# Altium PCB PX4FMUv2.4.6.PcbDoc (part 2 of 3)
Units mil, origin at the board's own origin, x right, y up, seen from the top; angles counter-clockwise.
Board outline 2756 x 1595 mil, 6 copper layers (Top, Ground, Horizontal, Vertical, Power, Bottom), stack 65.355 mil thick; 290 components, 261 nets, 1159 pads, 472 vias.
Unrouted connection lines stored in the file: 14.
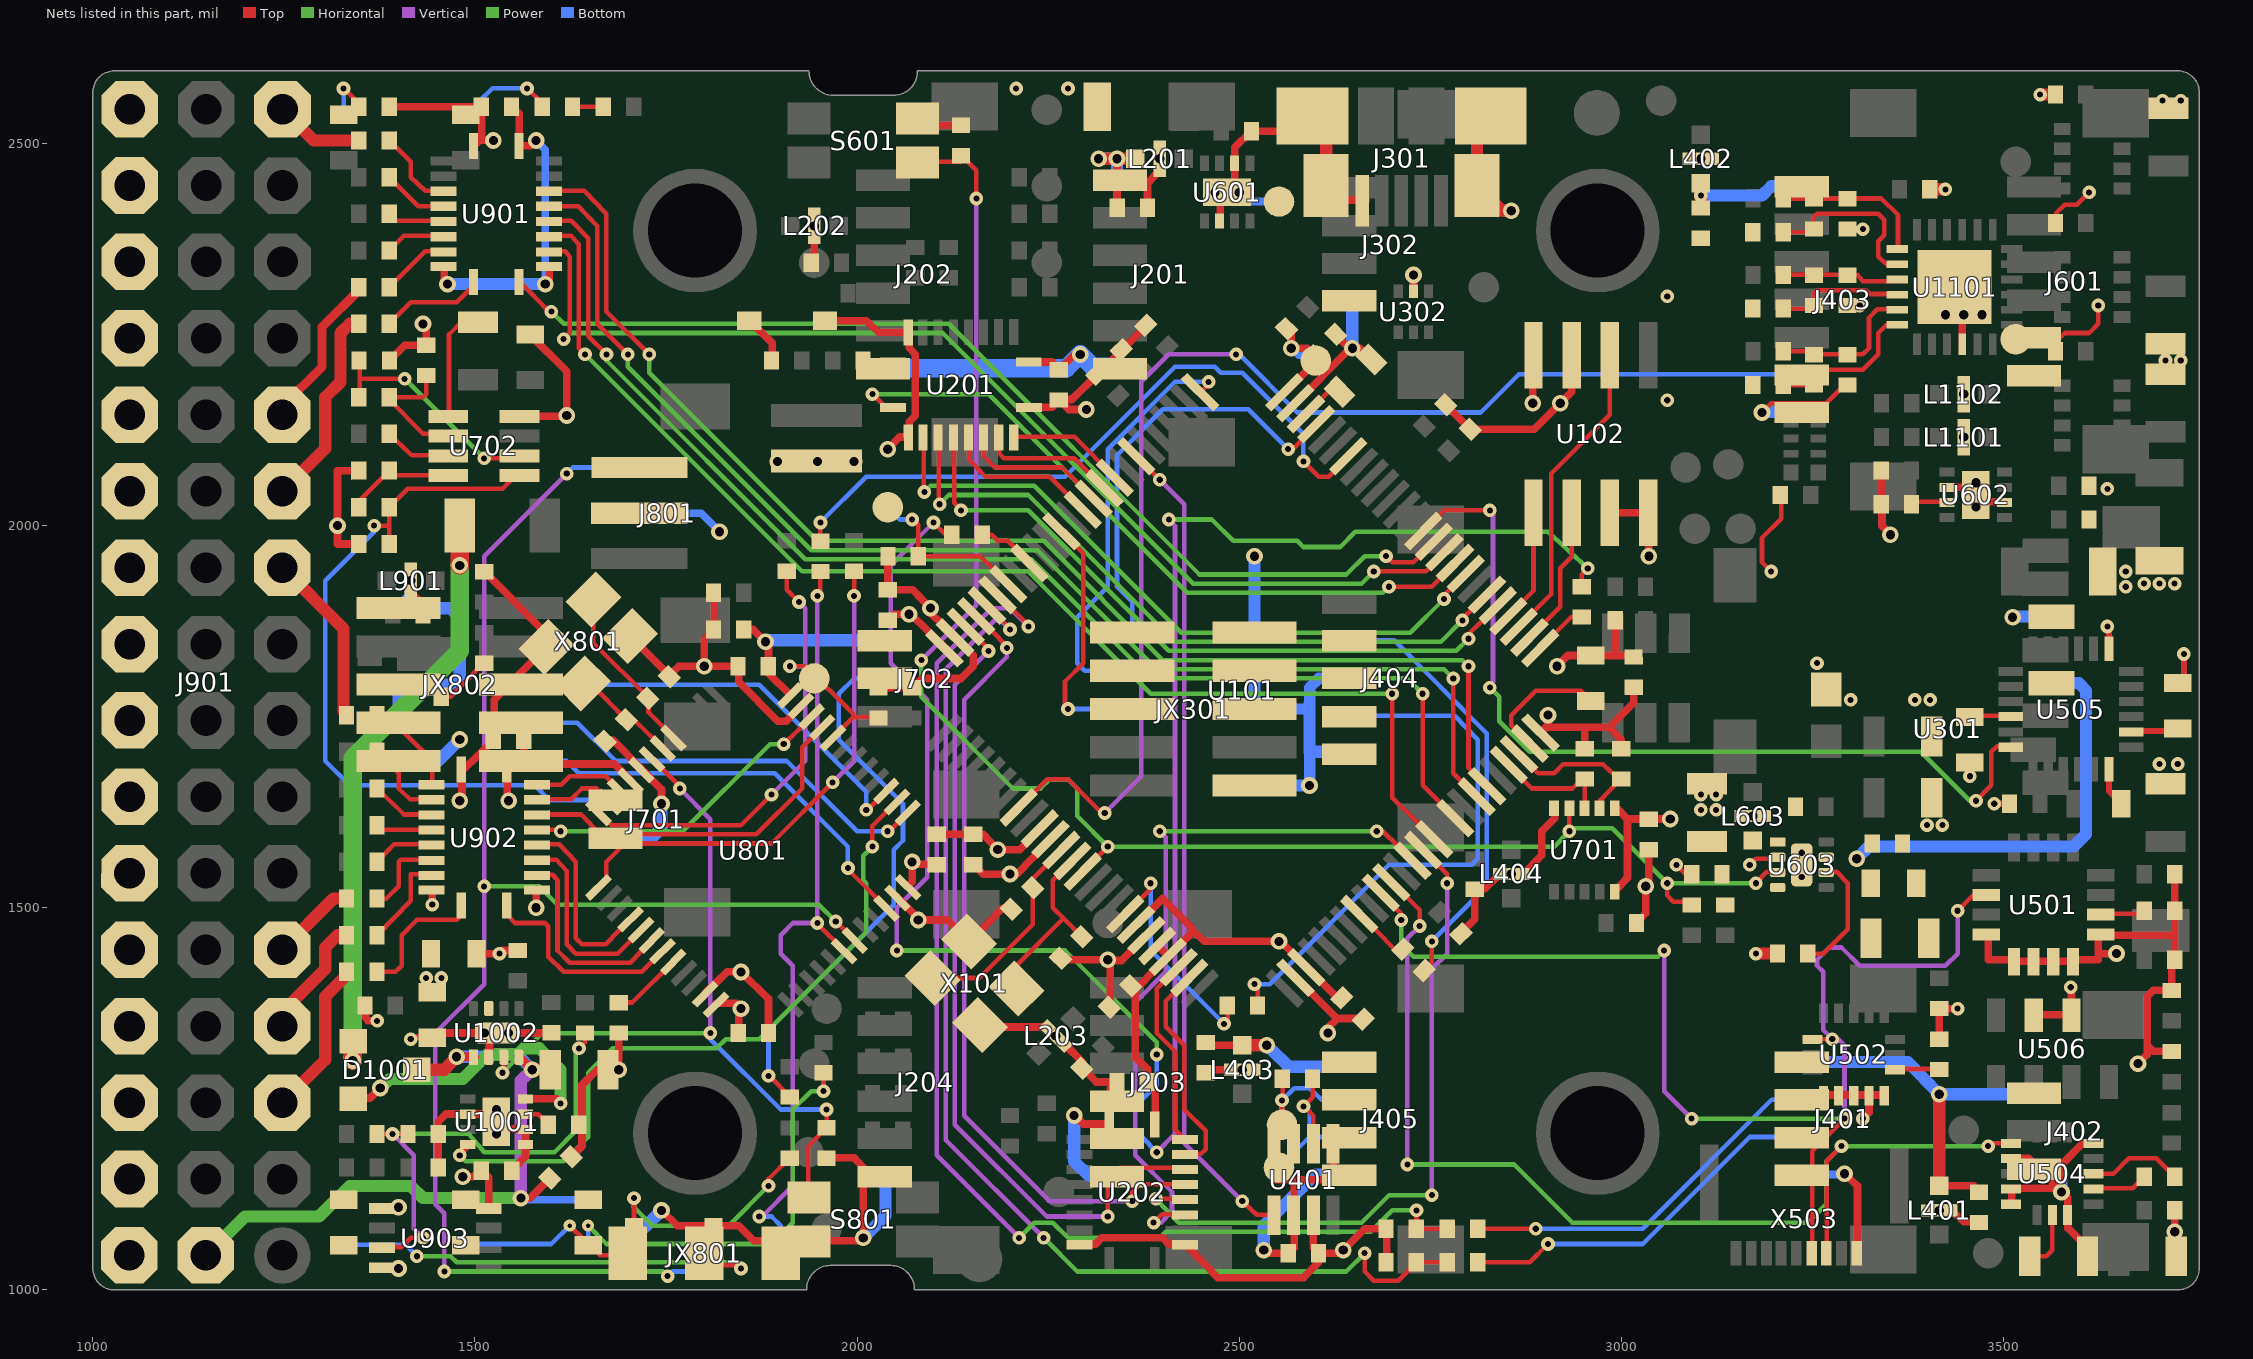
[diagram p6: the nets of this part, all layers, seen from the top]

## Via types
v1: diameter 17.84/17.84/17.84/17.84/17.84/17.84 (per signal layer), hole 8, Top to Bottom, 333 vias
v2: diameter 21.84/21.84/21.84/21.84/21.84/21.84 (per signal layer), hole 12, Top to Bottom, 129 vias
v3: diameter 15.84/15.84/15.84/15.84/15.84/15.84 (per signal layer), hole 6, Top to Bottom, 8 vias
v4: diameter 19.84/19.84/19.84/19.84/19.84/19.84 (per signal layer), hole 10, Top to Bottom, 2 vias

## Nets (pads, with @x,y where several pads share a name; then routed paths per layer and width w, separated by ;. In a path a pad name is that pad's centre, name@x,y a point inside that pad or via, vN(x,y) a via of type N, cw(c..) or ccw(c..) an arc to the next point about the centre after c; other vN are vias at no path point) (continued)
CAN1_TX: U101.82 U401.1 | length 1081.7
  Top w6: U101.82@2365,2091 v1(2396,2060) ; v1(2504,1116) 2523,1098 U401.1@2546,1098
  Vertical w6: v1(2396,2060) 2428,2028 2428,1192 v1(2504,1116)
CAN2_RX: R216.P$1 U101.51 | length 71
  Top w6: U101.51@2894,1840 2935,1881 R216.P$1@2948,1881
CAN2_TX: R215.P$1 U101.92 | length 76.6
  Top w6: R215.P$1@2164,1988 2176,1988 2184,1980 2197,1980 U101.92@2226,1952
CAN_H: CAN_H.P$1 J405.2 R409.P$1 U401.7 | length 225.9
  Top w6: R409.P$1@2557,1276 2557,1249 v1(2556,1248) 2556,1236 2572,1221 U401.7@2572,1191
  Bottom w6: 2556,1216 v1(2556,1248) 2572,1264 2592,1264 2608,1249 2645,1249
CAN_L: CAN_L.P$1 J405.3 R409.P$2 U401.6 | length 248.9
  Top w6: R409.P$2@2596,1276 2596,1252 v1(2584,1240) 2597,1228 U401.6@2597,1191
  Bottom w6: 2552,1160 2592,1200 ; v1(2584,1240) 2592,1233 2592,1200 ; 2645,1200 2592,1200
FMU-!RESET: C609.P$2 R635.P$1 S601.A1 U101.14 U603.3 U701.4 | length 2224.6
  Top w6: S601.A1@2079,2476 2136,2476 2136,2485 2156,2465 v1(2156,2428) ; U101.14@2296,1548 v1(2328,1580) ; v1(2932,1600) 2932,1630 U701.4@2933,1631 ; v1(3060,1532) 3060,1516 3068,1508 3092,1508 R635.P$1@3092,1504 ; v1(3176,1532) 3190,1547 U603.3@3205,1547
  Horizontal w6: v1(2084,1824) 2084,1776 2204,1656 2240,1656 2252,1668 2276,1668 2288,1656 2288,1620 v1(2328,1580) 2912,1580 v1(2932,1600) 2936,1604 2988,1604 v1(3060,1532) v1(3176,1532)
  Vertical w6: v1(2084,1824) 2156,1896 v1(2156,2428)
FMU-BOOT0: FMU-BOOT1101.P$1 R611.P$2 U101.94 | length 222.9
  Top w6: v1(2072,2008) 2080,2001 R611.P$2@2080,1960 2161,1960 U101.94@2198,1924
  Bottom w6: 2040,2024 2056,2008 v1(2072,2008)
FMU-CH1: U101.45 U901.7 | length 1717.6
  Top w6: U901.7@1597,2438 1643,2438 1672,2408 1672,2280 v1(1728,2224) ; v1(2800,1816) 2800,1683 U101.45@2825,1659
  Horizontal w6: v1(1728,2224) 1728,2200 1948,1980 2244,1980 2400,1824 2792,1824 v1(2800,1816)
FMU-CH1-PROT: J901.46 R913.P$2 | length 118
  Top w16: J901.46@1248,2545 1289,2504 R913.P$2@1349,2504
FMU-CH2: U101.44 U901.6 | length 1691.5
  Top w6: U901.6@1597,2418 1635,2418 1660,2392 1660,2264 v1(1700,2224) ; v1(2780,1800) 2780,1676 U101.44@2811,1645
  Horizontal w6: v1(1700,2224) 1700,2208 1940,1968 2236,1968 2392,1812 2768,1812 v1(2780,1800)
FMU-CH3: U101.42 U901.5 | length 1660.2
  Top w6: U901.5@1597,2399 1626,2399 1648,2376 1648,2248 v1(1672,2224) ; v1(2740,1780) 2740,1660 U101.42@2783,1617
  Horizontal w6: v1(1672,2224) 1672,2216 1932,1956 2228,1956 2384,1800 2720,1800 v1(2740,1780)
FMU-CH4: U101.40 U901.4 | length 1644.2
  Top w6: U901.4@1597,2379 1626,2379 1636,2368 1636,2232 v1(1644,2224) ; v1(2700,1780) 2700,1644 U101.40@2755,1590
  Horizontal w6: v1(1644,2224) 1928,1940 2224,1940 2384,1780 v1(2700,1780)
FMU-CH5: U101.60 U901.3 | length 1450.7
  Top w6: U901.3@1597,2359 1618,2359 1624,2352 1624,2252 v1(1616,2244) ; v1(2676,1940) 2744,1940 U101.60@2769,1965
  Horizontal w6: v1(1616,2244) 1624,2252 2112,2252 2440,1924 2660,1924 v1(2676,1940)
FMU-CH6: U101.61 U901.1 | length 1380.8
  Top w6: U901.1@1558,2320 1597,2280 v1(1600,2280) ; v1(2692,1960) 2700,1952 2728,1952 U101.61@2755,1979
  Horizontal w6: v1(1600,2280) 1616,2264 2120,2264 2448,1936 2640,1936 2664,1960 v1(2692,1960)
FMU-CH6-PROT: J901.31 R902.P$2 | length 268.5
  Top w16: J901.31@1248.04,2044.98 1304,2101 1304,2168 1324,2188 1324,2252 1336,2264 R902.P$2@1349,2264
FMU-I2C1_SCL: R401.P$1 R404.P$1 U101.95 | length 1631.5
  Top w6: U101.95@2184,1910 2224,1870 v1(2224,1868) ; v1(2732,1104) 2732,1080 R404.P$1@2773,1080
  Horizontal w6: v1(2212,1068) 2232,1088 2256,1088 2276,1068 2396,1068 2404,1076 2672,1076 2700,1104 v1(2732,1104)
  Vertical w6: v1(2212,1068) 2104,1176 2104,1820 2176,1892 2200,1892 v1(2224,1868)
FMU-I2C1_SDA: R402.P$1 R405.P$1 U101.96 | length 1553
  Top w6: U101.96@2170,1896 2200,1866 v1(2200,1864) ; v1(2664,1048) 2664,1024 2676,1012 2708,1012 2732,1036 R405.P$1@2773,1036
  Horizontal w6: v1(2244,1068) 2288,1024 2640,1024 v1(2664,1048)
  Vertical w6: v1(2200,1864) 2188,1876 2180,1876 2116,1812 2116,1196 v1(2244,1068)
FMU-I2C2_SCL: R306.P$1 U101.47 U701.3 | length 156.2
  Top w6: U101.47@2852,1687 2883,1656 2936,1656 2949,1669 2952,1669 U701.3@2952,1631
FMU-I2C2_SDA: R307.P$1 U101.48 U701.2 | length 206.2
  Top w6: U101.48@2866,1701 2891,1676 2912,1676 2924,1688 2976,1688 2996,1669 3000,1669 2972,1640 U701.2@2972,1631
FMU-SWCLK: JX301.4 U101.76 | length 559.4
  Top w6: U101.76@2449,2174 2460,2186 v1(2460,2188)
  Bottom w6: 2360,1810 2298,1810 2288,1820 2288,1880 2328,1920 2328,2100 2416,2188 v1(2460,2188)
FMU-SWDIO: JX301.2 U101.72 | length 561.9
  Top w6: v1(2564,2100) 2570,2100 U101.72@2602,2132
  Bottom w6: 2360,1860 2360,1900 2340,1920 2340,2092 2400,2152 2512,2152 v1(2564,2100)
FMU-SWO: JX301.6 U101.89 | length 339.9
  Top w6: U101.89@2268,1993 2296,1964 2296,1820 2272,1796 2272,1764 v1(2276,1760)
  Bottom w6: v1(2276,1760) 2360,1760
FMU-UART4_RX: U101.24 U202.8 | length 288.9
  Top w6: U202.8@2429,1178 2450,1178 2456,1184 2456,1208 2428,1236 2428,1320 2404,1344 2404,1378 U101.24@2435,1409
FMU-UART4_TX: U101.23 U202.9 | length 253.3
  Top w6: U101.23@2421,1423 2392,1394 2392,1336 2416,1312 2416,1210 U202.9@2429,1197
FMU-UART7_RX: U101.38 U202.4 | length 959.3
  Top w6: v1(2388,1088) 2399,1099 U202.4@2429,1099 ; v1(2680,1600) 2688,1600 U101.38@2727,1562
  Horizontal w6: v1(2396,1600) v1(2680,1600)
  Vertical w6: v1(2388,1088) 2398,1088 2412,1103 2412,1128 2364,1176 2364,1376 2404,1416 2404,1592 v1(2396,1600)
FMU-UART7_TX: U101.39 U202.5 | length 901.9
  Top w6: v1(2391,1119) U202.5@2429,1119 ; U101.39@2740,1577 2740,1576 2741,1576 2772,1544 v1(2772,1532)
  Horizontal w6: v1(2391,1119) 2421,1088 2660,1088 2696,1124 v1(2752,1124)
  Vertical w6: v1(2752,1124) 2752,1420 2772,1440 v1(2772,1532)
FMU-UART8_RX: U101.97 U202.6 | length 1044.6
  Top w6: U101.97@2157,1882 2196,1842 v1(2196,1840) ; v1(2360,1116) 2360,1128 2370,1138 U202.6@2429,1138
  Vertical w6: v1(2196,1840) 2196,1828 2140,1772 2140,1228 2252,1116 v1(2360,1116)
FMU-UART8_TX: U101.98 U202.7 | length 1088.1
  Top w6: U101.98@2143,1868 2172,1838 v1(2172,1836) ; v1(2328,1096) 2328,1144 2344,1160 2427,1160 U202.7@2429,1158
  Vertical w6: v1(2172,1836) 2128,1792 2128,1216 2248,1096 v1(2328,1096)
FMU-USART2_CTS: U101.84 U201.9 | length 154.2
  Top w6: U201.9@2205,2116 2285,2116 U101.84@2337,2063
FMU-USART2_RTS: U101.85 U201.8 | length 178.1
  Top w6: U201.8@2186,2116 2186,2095 2192,2088 2284,2088 U101.85@2324,2049
FMU-USART2_RX: U101.87 U201.6 | length 206.4
  Top w6: U201.6@2146,2116 2146,2087 2168,2064 2252,2064 U101.87@2296,2021
FMU-USART2_TX: U101.86 U201.7 | length 192.2
  Top w6: U201.7@2166,2116 2166,2091 2180,2076 2268,2076 U101.86@2310,2035
FMU-USART3_CTS: U101.58 U201.3 | length 899.3
  Top w6: U201.3@2087,2116 2087,2046 v1(2088,2044) ; v1(2768,1904) 2768,1909 U101.58@2797,1938
  Horizontal w6: v1(2088,2044) 2096,2052 2232,2052 2424,1860 2724,1860 v1(2768,1904)
FMU-USART3_RTS: U101.59 U201.1 | length 922.3
  Top w6: v1(2020,2172) 2038,2155 U201.1@2048,2155 ; v1(2696,1920) 2752,1920 U101.59@2783,1952
  Horizontal w6: v1(2020,2172) 2172,2172 2432,1912 2688,1912 v1(2696,1920)
FMU-USART3_RX: U101.56 U201.4 | length 916.3
  Top w6: U201.4@2107,2116 2107,2030 v1(2108,2028) ; v1(2792,1876) 2792,1878 U101.56@2825,1910
  Horizontal w6: v1(2108,2028) 2120,2040 2224,2040 2416,1848 2764,1848 v1(2792,1876)
FMU-USART3_TX: U101.55 U201.5 | length 906.7
  Top w6: U201.5@2127,2116 2127,2030 v1(2136,2020) ; v1(2800,1852) 2800,1858 U101.55@2839,1896
  Horizontal w6: v1(2136,2020) 2224,2020 2408,1836 2784,1836 v1(2800,1852)
FMU-VDD_3V3: C101.P$1 C201.P$1 C202.P$1 C402.P$1 C603.P$1 C604.P$1 C606.P$1 C607.P$1 C608.P$1 C610.P$1 C612.P$1 C616.P$1 C701.P$1 C902.P$1 D602.A JX301.1 R301.P$2 R302.P$2 R303.P$2 R304.P$2 R305.P$2 R306.P$2 R307.P$2 R401.P$2 R402.P$2 R602.P$2 R604.P$2 U101.11 U101.19 U101.21 U101.22 U101.28 U101.50 U101.75 U101.100 U102.3 U102.7 U102.8 U201.2 U201.10 U201.19 U202.2 U202.10 U202.19 U301.4 U401.3 U603.7 U701.1 U701.10 U901.2 U901.10 U901.19 VDD_3V1101.P$1 | length 4153.1
  Top w6: v1(3196,1940) 3184,1952 3184,1984 3209,2009 R604.P$2@3209,2040
  Top w10: U901.19@1460,2340 1460,2321 v2(1464,2316) ; C902.P$1@1548,2548 1558,2539 1558,2497 1573,2497 v2(1580,2504) ; v2(1592,2316) 1597,2321 1597,2340 U901.2@1596,2340 ; D602.A@1958,2268 2012,2268 2028,2253 2068,2253 2068,2233 2076,2224 2076,2144 2068,2136 2068,2116 2056,2116 v2(2040,2100) ; C608.P$1@2040,1877 2048,1884 v2(2068,1884) 2070,1884 U101.100@2115,1840 ; C610.P$1@2152,1557 2165,1544 v2(2200,1544) 2209,1544 U101.11@2254,1590 ; U201.10@2225,2155 2255,2155 C201.P$1@2264,2165 ; U202.19@2292,1060 2312,1060 2320,1068 2400,1068 2408,1060 2428,1060 2429,1060 2472,1016 2584,1016 2604,1036 C402.P$1@2604,1048 ; v2(2300,2152) 2277,2152 C201.P$1@2264,2165 ; U101.19@2365,1478 2400,1512 2438,1474 2438,1467 ; R301.P$2@2379,2262 2347,2230 2315,2198 2281,2165 C201.P$1@2264,2165 ; U202.10@2390,1217 2390,1263 2380,1272 2380,1289 2364,1304 2364,1392 2358,1398 2369,1398 U101.22@2407,1437 ; U101.21@2393,1450 U101.22@2407,1437 ; U101.75@2560,2174 2599,2213 2599,2223 2589,2232 v2(2568,2232) 2568,2253 R602.P$2@2563,2259 ; U401.3@2597,1098 2597,1055 C402.P$1@2604,1048 ; C101.P$1@2635,1382 2628,1382 2588,1423 2554,1456 v2(2552,1456) 2454,1456 2440,1470 2438,1467 ; R402.P$2@2693,1036 2693,1080 2664,1080 v2(2636,1052) 2632,1048 C402.P$1@2604,1048 ; R305.P$2@2770,2158 2802,2126 2886,2126 v2(2920,2160) 2935,2175 U102.3@2934.98,2223 ; U101.50@2896,1729 U101.50@2894,1729 ; v2(2904,1752) 2904,1739 U101.50@2894,1729 ; R306.P$2@2951.99,1708 2952,1736 ; U102.7@2985.02,2017 U102.8@3035.02,2017.01 3036,2016 v2(3036,1960) ; U701.10@2992,1522 3008,1539 3008,1616 ; U701.1@2992,1631 2994,1631 3008,1616 ; R307.P$2@2999.99,1708 3000,1720 2984,1736 ; C607.P$1@3016,1789 3016,1768 2984,1736 ; v2(3064,1616) 3036,1616 3008,1616 ; U101.22@2407,1437 2438,1467 ; U101.50@2894,1729 2902,1736 2952,1736 ; 2952,1736 2984,1736
  Bottom w10: v2(1580,2504) 1592,2492 v2(1592,2316) ; v2(2568,2232) 2578,2223 2599,2223 2600,2221 2600,2216
  Bottom w16: v2(1464,2316) v2(1592,2316) ; 2520,1860 v2(2520,1960) ; v2(3308,1564) 3324,1580 3592,1580 3608,1596 3608,1784 3599,1794 3563,1794
FMU-VDD_5V5: C601.P$1 C615.P$1 L603.P$2 R603.P$1 U603.1 U603.4
FMU_AUX_ADC1: R408.P$1 U101.18 | length 303.5
  Top w6: U101.18@2351,1492 2384,1525 v1(2384,1532) ; v1(2480,1348) 2485,1353 R408.P$1@2485,1372
  Bottom w6: v1(2384,1532) 2384,1444 v1(2480,1348)
FMU_AUX_ADC1_PROT: J404.4 R408.P$2 | length 726.1
  Top w6: v1(2520,1400) 2524,1397 R408.P$2@2524,1372
  Bottom w6: v1(2520,1400) 2540,1400 2696,1556 2804,1556 2812,1564 2812,1720 2782,1751 2645,1751
FMU_AUX_ADC2: R407.P$1 U101.33 | length 76.4
  Top w6: U101.33@2658,1492 2703,1446 R407.P$1@2715,1446
FMU_AUX_ADC2_PROT: J404.2 R407.P$2 | length 576.4
  Top w6: R407.P$2@2744,1416 2742,1419 2752,1429 v1(2752,1456)
  Bottom w6: 2645,1850 2703,1850 2824,1728 2824,1528 v1(2752,1456)
FRAM_MISO: U101.53 U102.2 | length 404.3
  Top w6: U101.53@2866,1868 2908,1910 2908,2068 2985,2145 U102.2@2984.98,2223
FRAM_MOSI: U101.54 U102.5 | length 148.7
  Top w6: U101.54@2852,1882 2885,1915 U102.5@2885.02,2016.99
FRAM_SCK: U101.52 U102.6 | length 185.8
  Top w6: U101.52@2880,1854 2920,1894 2920,1944 2935,1959 U102.6@2935.02,2017
GND: B601.2 C101.P$2 C102.P$2 C103.P$1 C201.P$2 C202.P$2 C401.P$2 C402.P$2 C501.P$2 C502.P$2 C503.P$2 C504.P$2 C505.P$2 C506.P$2 C507.P$2 C508.P$2 C509.P$2 C511.P$2 C512.P$2 C513.P$2 C514.P$2 C515.P$2 C601.P$2 C602.P$1 C603.P$2 C604.P$2 C605.P$2 C606.P$2 C607.P$2 C608.P$2 C609.P$1 C610.P$2 C611.P$2 C612.P$2 C613.P$2 C614.P$2 C615.P$2 C616.P$2 C617.P$2 C618.P$2 C701.P$2 C702.P$2 C703.P$2 C704.P$2 C801.P$1 C802.P$2 C803.P$2 C804.P$2 C805.P$2 C806.P$1 C901.P$2 C902.P$2 C903.P$2 C1001.P$2 C1002.P$2 C1003.P$2 C1004.P$2 C1005.P$2 C1008.P$2 C1101.P$2 C1102.P$2 C1103.P$2 C1104.P$2 C1105.P$2 C1106.P$2 C1107.P$2 C1108.P$2 C1109.P$2 C1110.P$2 D201.A D202.A D203.A D401.A D402.A D403.A D404.A D701.A D801.A D901.A D902.A D903.A GND..P$1 GND.P$1 J201.6 J202.6 J203.6 J204.6 J301.GND J301.GND1 J301.GND2 J301.GND3 J301.GND4 J302.4 J401.4 J402.3 J403.7 J404.3 J404.5 J405.4 J601.5 J601.6 J701.2 J801.P$2 J901.3 J901.6 J901.9 J901.12 J901.15 J901.18 J901.21 J901.24 J901.27 J901.30 J901.33 J901.36 J901.39 J901.42 J901.45 J901.48 JX301.3 JX301.5 JX301.9 JX801.3 JX802.3 JX802.5 JX802.9 L201.P$3 L201.P$4 L201.P$5 L202.P$3 L202.P$4 L202.P$5 L203.P$3 L203.P$4 L203.P$5 L401.P$3 L401.P$4 L401.P$5 L402.P$3 L402.P$4 L402.P$5 L403.P$3 L403.P$4 L403.P$5 L404.P$3 L404.P$4 L404.P$5 L603.P$3 L603.P$4 L603.P$5 L901.P$3 L901.P$4 L901.P$5 L1101.P$3 L1101.P$4 L1101.P$5 L1102.P$3 L1102.P$4 L1102.P$5 R102.P$2 R403.P$1 R610.P$2 R611.P$1 R615.P$2 R616.P$2 R617.P$2 R621.1 R702.P$2 R704.P$1 R706.P$2 R708.P$1 R711.P$1 R713.P$2 R801.P$2 R802.P$2 R919.P$1 R1001.P$1 R1002.P$1 R1103.P$2 R1104.P$2 R1107.P$2 R1111.P$2 R1114.P$2 R1115.P$1 S601.B3 S801.B3 U101.10 U101.20 U101.27 U101.74 U101.99 U102.4 U201.11 U202.11 U301.6 U302.2 U401.2 U401.5 U401.8 U501.8 U501.9 U501.10 U501.11 U501.12 U501.13 U502.9 U502.10 U502.11 U502.12 U502.13 U504.5 U504.10 U504.12 U504.13 U504.16 U505.1 U505.18 U506.2 U506.3 U601.2 U601.6 U601.GND U601.P$2 U601.P$3 U602.2 U602.6 U602.GND U602.P$2 U602.P$3 U603.2 U603.GND U701.5 U702.4 U801.8 U801.23 U801.35 U801.47 U901.11 U902.11 U903.1 U903.4 U1001.2 U1001.5 U1001.6 U1001.GND U1001.P$2 U1001.P$3 U1002.2 U1002.GND U1101.P$10 U1101.P$25 X101.2 X101.4 X503.2 X801.2 X801.4 | length 11031.7
  Top w6: v1(3072,1556) 3084,1544 C615.P$2@3093,1544 ; L402.P$3@3089,2480 L402.P$5@3104,2480 L402.P$4@3120,2480 ; v1(3168,1556) 3176,1564 3203,1564 U603.2@3205,1566 ; v2(3184,2148) 3196,2160 3268,2160 3293,2185 C1110.P$2@3296,2185 ; C1109.P$2@3296,2289 3312,2289 v1(3312,2288) ; C1108.P$2@3296,2389 3316,2389 v1(3316,2388) ; L1102.P$4@3448,2157 L1102.P$5@3448,2172 L1102.P$3@3448,2188 ; C1107.P$2@3569,2228 3569,2241 3580,2252 3612,2252 3624,2264 v1(3624,2288) ; C1106.P$2@3569,2396 3569,2409 3580,2420 3596,2420 v1(3612,2436) ; C1101.P$2@3715.99,2546 3722,2546 v1(3732,2556)
  Top w8: v1(1416,1328) 1419,1331 C1003.P$2@1444,1331 ; v1(3456,1672) C512.P$2@3456,1691 ; v1(3488,1636) C514.P$2@3509,1636 ; v1(3636,1868) 3638,1867 U505.1@3638,1839 ; U505.18@3638,1682 3638,1653 C513.P$2@3654,1636 ; C515.P$2@3727.99,1794 3726,1794 3736,1804 v1(3736,1832)
  Top w10: C703.P$2@1349,1976 1320,1976 v2(1320,2000) 1320,2072 R702.P$2@1349,2072 ; C1008.P$2@1357,1372 1357,1356 1360,1352 v1(1372,1352) ; U903.4@1379,1030 1399,1030 v2(1400,1028) ; U903.1@1379,1107 1399,1107 v2(1400,1108) ; R706.P$2@1388,2216 1408,2236 C704.P$2@1435.99,2236 1436,2260 v2(1432,2264) ; R711.P$1@1388,2548 1509,2548 1509,2507 1499,2497 1506,2504 v2(1524,2504) ; L901.P$4@1416,1944 L901.P$5@1416,1928 1416,1913 1432,1897 D903.A@1432,1884 ; C1003.P$2@1444,1331 1450,1336 v2(1512,1336) 1519,1330 U1002.2@1519,1305 ; D901.A@1452,1160 D902.A@1452,1204 1452,1220 1462,1230 1491,1230 U1001.GND@1523,1230 ; v2(1480,1640) 1483,1643 1483,1681 1485,1681 1525,1720 1525,1772 1594,1842 1594,1858 R919.P$1@1512,1940 ; C1004.P$2@1502,1440 v1(1532,1440) 1536,1444 C1002.P$2@1555.99,1444 ; U1001.GND@1528,1205 1534,1211 1566,1211 1566,1191 1566,1174 C901.P$2@1548,1156 ; U1001.GND@1528,1220 U1001.GND@1523,1230 ; U1001.GND@1528,1236 U1001.GND@1523,1230 ; v2(1544,1336) 1600,1336 R1002.P$1@1600,1337 ; U702.4@1559,2143 1619,2143 v2(1620,2144) 1620,2202 C702.P$2@1571.99,2250 ; C1005.P$2@1626,1174 1640,1188 R1001.P$1@1640,1220 ; R1001.P$1@1636,1216 R1001.P$1@1640,1220 ; C806.P$1@1671,1719 1681,1719 1718,1681 1744,1655 v2(1744,1636) ; C1001.P$2@1684,1288 1660,1288 1640,1268 R1001.P$1@1640,1220 ; v2@1688,1287 v2(1688,1288) R802.P$2@1688,1337 ; X801.2@1703,1855 C805.P$2@1754,1804 ; v2(1744,1104) 1765,1084 1812,1084 1845,1084 1865,1064 1938,1064 2004,1064 v2(2008,1068) 2008,1160 1996,1173 C801.P$1@1960,1173 ; C805.P$2@1754,1802 C805.P$2@1754,1804 ; U801.23@1802,1389 1830,1416 v2(1848,1416) 1884,1381 C802.P$2@1884,1336 ; D801.A@1813,1912 1813,1864 1800,1852 v2(1800,1816) ; C803.P$2@1843,1814 C803.P$2@1845,1816 ; U801.47@1927,1764 1907,1744 1896,1744 1845,1796 C803.P$2@1845,1816 ; D202.A@1941,2344 1944,2348 1944,2377 L202.P$5@1944,2392 L202.P$4@1944,2408 ; B601.2@1947,2084 v2(1948,2084) ; R801.P$2@2027.99,1788 R713.P$2@2071.99,1788 2085,1800 2136,1800 2152,1816 2152,1830 2129,1854 2096,1886 v2(2096,1892) 2073,1916 C608.P$2@2039.99,1916 2040,1960 R611.P$1@2041,1960 ; U801.35@2052,1514 2080,1486 v2(2080,1484) 2118,1484 2147,1455 2190,1499 C102.P$2@2203,1499 ; S601.B3@2079,2533 2088,2524 C609.P$1@2136,2524 ; C804.P$2@2103.99,1596 C610.P$2@2151.99,1596 2165,1596 v2(2184,1576) 2213,1576 U101.10@2240,1604 ; X101.4@2161,1347 2164,1344 2249,1344 L203.P$5@2260,1332 ; U201.11@2225,2214 2255,2214 C201.P$2@2263.99,2204 2285,2224 v2(2292,2224) ; C103.P$1@2267,1435 2269,1432 v2(2328,1432) v2@2330,1431 ; L203.P$3@2272,1321 2295,1298 2295,1291 2313,1272 2341,1272 2331,1263 2331,1217 2296,1217 v2(2284,1228) ; C612.P$2@2331,1371 2331,1416 2331,1430 v2@2330,1431 ; U101.20@2379,1464 2346,1431 v2@2330,1431 ; D201.A@2380,2416 2380,2448 2396,2465 L201.P$5@2396,2480 L201.P$3@2396,2496 ; D404.A@2456,1285 2460,1288 2489,1288 L403.P$5@2504,1288 L403.P$3@2520,1288 ; U601.2@2475,2399 2475,2431 2469,2436 U601.GND@2484,2436 ; U601.P$3@2500,2436 2494,2442 U601.6@2494,2474 2494,2495 R617.P$2@2516,2516 J301.GND4@2576,2516 ; v2(2532,1052) 2536,1048 2565,1048 2572,1055 2572,1098 2572,1144 ; U401.8@2546,1191 2546,1144 2572,1144 ; U101.27@2574,1409 2628,1355 ; U101.74@2574,2160 2644,2231 v2@2644,2232 ; J301.GND4@2596,2536 J301.GND4@2614,2519 ; J301.GND3@2614,2446 2634,2426 2661,2426 J301.GND@2666,2426 ; v2(2616,1336) 2616,1343 2628,1355 ; U401.5@2623,1191 2623,1144 2572,1144 ; C606.P$2@2626,2250 v2@2644,2232 ; C101.P$2@2662,1355 2628,1355 ; C613.P$2@2673,2217 2658,2232 v2(2648,2232) v2@2644,2232 ; U302.2@2728,2307 v2(2728,2328) ; R102.P$2@2790,1467 2808,1485 2808,1525 2821,1525 2841,1544 L404.P$5@2856,1544 2872,1544 2896,1569 2896,1600 2913,1617 U701.5@2913,1631 ; J301.GND1@2811,2519 J301.GND1@2829,2536 ; v2(2884,2160) 2884,2222 U102.4@2884.98,2222.99 ; v2(2916,1816) 2930,1830 C611.P$2@2959.99,1830 2996,1830 ; R610.P$2@2993,1876 2993,1834 2996,1830 ; C607.P$2@3015.99,1828 3015,1830 2996,1830 ; R704.P$1@3020,1480 3032,1493 v2(3032,1528) 3036,1532 C701.P$2@3036,1577 ; L603.P$3@3157,1620 L603.P$5@3172,1620 L603.P$4@3188,1620 ; U502.9@3265,1255 3285,1255 3304,1255 U502.12@3324,1255 ; v2@3296,1152 v2(3292,1152) 3309,1136 X503.2@3309,1048 ; v1(3316,1224) 3324,1232 U502.12@3324,1254 U502.12@3324,1255 ; R615.P$2@3341,2072 3341,2028 3341,2000 v2(3352,1988) ; U502.13@3344,1255 U502.12@3324,1255 ; L401.P$4@3401,1104 L401.P$5@3416,1104 3432,1104 3448,1089 D401.A@3468,1089 ; C503.P$2@3412,1368 C503.P$2@3416,1368 ; C505.P$2@3420,1328 C505.P$2@3415.99,1328 C503.P$2@3416,1369 ; U602.6@3427,2050 3459,2050 U602.P$3@3464,2056 ; U1101.P$25@3436,2312 3436,2288 v2(3448,2276) 3446,2274 U1101.P$10@3446,2238 ; v1(3440,1368) C503.P$2@3416,1368 ; L1101.P$4@3448,2101 L1101.P$5@3448,2116 L1101.P$3@3448,2132 ; U602.GND@3464,2025 U602.GND@3470,2031 ; U602.GND@3464,2040 3470,2035 U602.GND@3470,2031 ; U501.8@3478,1466 3480,1466 3480,1432 3514,1432 3514,1430 U501.10@3540,1430 ; U602.2@3502,2031 U602.GND@3470,2031 ; U504.13@3511,1113 3511,1133 3572,1133 v2(3576,1128) ; U504.10@3511,1172 3533,1172 v2(3576,1128) ; U506.3@3540,1360 U506.2@3589,1360 ; U501.10@3540,1429 U501.10@3540,1430 ; v1(3588,1396) 3589,1396 U506.2@3589,1360 ; U506.2@3591,1362 U506.2@3589,1360 ; C509.P$2@3610,1044 3610,1055 3584,1081 3584,1099 3584,1121 v2(3576,1128) ; U504.5@3618,1192 3604,1192 3576,1164 v2(3576,1128) ; v2(3648,1440) 3624,1440 ; v2(3676,1296) 3688,1308 3688,1320 ; C401.P$2@3719.99,1312 3696,1312 3688,1320 ; C507.P$2@3724,1104 3724,1077 v2(3724,1076) 3726,1075 C506.P$2@3726,1044 ; C502.P$2@3724,1544 C504.P$2@3724,1496 3724,1464 ; C805.P$2@1754,1804 1767,1816 v2(1800,1816) ; v2(1800,1816) C803.P$2@1845,1816 ; C503.P$2@3416,1368 C503.P$2@3416,1369 ; C503.P$2@3416,1368 C503.P$2@3416,1369 ; U501.10@3540,1430 3565,1430 3591,1430 3591,1432 3624,1432 3624,1440 ; 3624,1440 3624,1466 3627,1466 3629,1464 3724,1464 ; 3688,1320 3688,1384 3696,1392 3720,1392 3720,1429 C508.P$2@3724,1432 3724,1464
  Top w16: v2(1512,1336) U1002.GND@1528,1336 ; C1001.P$2@1674,1288 1684,1288 v2(1688,1288) ; J301.GND4@2576,2516 J301.GND4@2596,2536 ; J301.GND3@2614,2446 J301.GND4@2614,2519 ; J301.GND1@2811,2519 2811,2446 2844,2412 v2(2856,2412) ; v1(3176,1440) C602.P$1@3205,1440 ; R1115.P$1@3404,2440 v1(3424,2440) ; C605.P$2@3406,1641 C605.P$2@3406,1660 ; C501.P$2@3406,1724 C501.P$2@3406,1739 ; v1(3548,2564) C1105.P$2@3569,2564
  Bottom w10: 1700,1048 1700,1060 ; 1716,2016 1796,2016 v2(1820,1992) ; 2341,1149 2344,1146 ; 2342,2208 2345,2206 ; U601.P$3@2500,2436 2512,2424 2552,2424 ; 2643,1704 2645,1702 ; 2645,2295 2648,2291 ; v2(3184,2148) v2@3185,2149 ; 3237,1151 3291,1151 v2(3292,1152) ; 3546,1159 3541,1159 3562,1159
  Bottom w15: 2520,1760 2592,1760 ; v2(2592,1660) 2592,1704 ; 2592,1768 2592,1788 2604,1800 2645,1800
  Bottom w16: 1400,1742 1400,1792 1468,1792 1480,1804 1480,1880 1468,1892 1400,1892 1416,1908 L901.P$5@1416,1928 ; 1685,1592 1732,1592 1744,1604 v2(1744,1636) ; 1700,1060 v2(1744,1104) ; v2(2008,1068) 2037,1097 2037,1149 ; v2(2284,1228) 2284,1168 2304,1149 2341,1149 ; 2520,1660 v2(2592,1660) ; 2520,1760 2520,1810 ; v2(2532,1052) 2532,1084 2599,1151 2645,1151 ; 2592,1768 2592,1760 2592,1704 2643,1704 ; v2(2648,2232) 2648,2291 ; v2@3185,2149 3237,2149 ; v2(3512,1880) 3512,1881 3563,1881 ; 3562,1159 3576,1144 v2(3576,1128)
  Bottom w24: 2035,2206 2274,2206 v2(2292,2224) 2308,2208 2342,2208
  other v1: 3236,1540 3236,1572 3400,1608 3420,1608 3104,1628 3124,1628 3104,1648 3124,1648 3704,1688 3728,1688 3300,1772 3384,1772 3404,1772 3256,1820 3660,1920 3684,1924 3704,1924 3724,1924 3660,1940 3636,2048 3060,2164 3712,2216 3732,2216 3060,2300 3708,2556 2208,2572 2276,2572
  other v2: 1896,2084 1996,2084 3424,2276 3472,2276
GPIO_EXT_1: J403.6 U101.8 | length 1661.5
  Top w6: U101.8@2212,1631 2249,1668 2276,1668 2320,1624 v1(2324,1624)
  Vertical w6: v1(2324,1624) 2372,1672 2372,2188 2408,2224 v1(2496,2224)
  Bottom w6: v1(2496,2224) 2500,2224 2576,2148 2816,2148 2866,2198 3237,2198
GYRO_DRDY: U101.35 U501.6 U502.6 X503.5 | length 1623.6
  Top w6: U101.35@2685,1520 2712,1492 v1(2712,1484) ; X503.5@3250,1048 3250,1182 v1(3292,1224) ; U502.6@3251,1328 3268,1328 v1(3276,1328) ; v1(3440,1496) 3460,1516 3477,1516 U501.6@3478,1517
  Horizontal w6: v1(2712,1484) 2712,1452 2728,1436 3048,1436 v1(3056,1444) ; v1(3092,1224) v1(3292,1224)
  Vertical w6: v1(3056,1444) 3056,1260 v1(3092,1224) ; v1(3292,1224) 3292,1320 3284,1328 v1(3276,1328) 3264,1340 3264,1416 3256,1424 3256,1432 3272,1448 3288,1448 3312,1424 3424,1424 3440,1440 v1(3440,1496)
IO-!RESET: C801.P$2 S801.A1 U801.7 U1002.3 | length 1030.1
  Top w6: v1(1536,1284) 1538,1286 U1002.3@1538,1305 ; U801.7@1732,1695 1768,1659 v1(1768,1656) ; S801.A1@1938,1121 1936,1122 1936,1188 C801.P$2@1959.99,1212 v1(1960,1236)
  Horizontal w6: v1(1536,1284) 1588,1336 v1(1808,1336)
  Vertical w6: v1(1768,1656) 1808,1616 v1(1808,1336)
  Bottom w6: v1(1808,1336) 1808,1328 1900,1236 v1(1960,1236)
IO-!VDD_SERVO_IN_FAULT: U801.38 U1001.4 | length 919.2
  Top w6: v1(1480,1176) 1491,1187 U1001.4@1491,1191 ; v1(2020,1580) 2020,1607 U801.38@2052,1639
  Horizontal w6: v1(1480,1176) 1488,1168 1616,1168 1648,1200 1648,1284 1680,1316 1816,1316 1828,1328 1872,1328 2012,1468 2012,1532 2008,1536 2008,1568 v1(2020,1580)
IO-BOOT0: IO-BOOT1101.P$1 R801.P$1 U801.44 | length 221.8
  Top w6: v1(1912,1816) 1932,1816 1995,1754 1995,1749 ; U801.44@1969,1723 1995,1749 ; R801.P$1@2028,1749 1995,1749
  Bottom w6: v1(1912,1816) 1928,1816 1944,1800
IO-BOOT1: R802.P$1 U801.20 | length 94.4
  Top w6: R802.P$1@1688,1376 1706,1376 U801.20@1760,1430
IO-CH1: U801.10 U902.9 | length 122.1
  Top w6: U902.9@1581,1661 1613,1661 1624,1672 1671,1672 U801.10@1691,1653
IO-CH1-PROT: J901.28 R917.P$2 | length 228.2
  Top w16: J901.28@1248.03,1944.98 1328,1865 1328,1757 R917.P$2@1333,1752
IO-CH2: U801.11 U902.8 | length 108.6
  Top w6: U902.8@1581,1642 1626,1642 1640,1656 1659,1656 U801.11@1677,1639
IO-CH3: U801.45 U902.7 | length 475.1
  Top w6: U902.7@1581,1622 1639,1622 1664,1596 1868,1596 1928,1656 1928,1710 U801.45@1955,1737
IO-CH4: U801.46 U902.6 | length 423.1
  Top w6: U902.6@1581,1602 1611,1602 v1(1612,1600) ; v1(1904,1714) U801.46@1941,1750
  Horizontal w6: v1(1612,1600) 1772,1600 1886,1714 v1(1904,1714)
IO-CH5: U801.16 U902.5 | length 250.5
  Top w6: U902.5@1581,1583 1610,1583 1632,1560 1632,1460 1640,1452 1671,1452 U801.16@1704,1486
IO-CH6: U801.17 U902.4 | length 258
  Top w6: U902.4@1581,1563 1606,1563 1620,1548 1620,1452 1632,1440 1687,1440 U801.17@1718,1472
IO-CH7: U801.18 U902.3 | length 265.6
  Top w6: U902.3@1581,1543 1602,1543 1608,1536 1608,1444 1624,1428 1703,1428 U801.18@1732,1458
IO-CH8: U801.19 U902.1 | length 283.4
  Top w6: U902.1@1542,1504 1542,1491 1552,1480 1592,1480 1596,1476 1596,1436 1616,1416 1718,1416 U801.19@1746,1444
IO-CH8-PROT: J901.7 R905.P$2 | length 206.2
  Top w6: R905.P$2@1333,1413 R905.P$2@1333,1416
  Top w16: J901.7@1248,1245 1304,1301 1304,1384 R905.P$2@1333,1413
IO-SWCLK: JX802.4 U801.37 | length 575.5
  Top w6: v1(2040,1600) 2042,1600 U801.37@2066,1625
  Bottom w6: 1560,1742 1634,1742 1684,1692 1908,1692 2000,1600 v1(2040,1600)
IO-SWDIO: JX802.2 U801.34 | length 575.1
  Top w6: v1(1988,1552) 1988,1550 U801.34@2038,1500
  Bottom w6: 1560,1692 1620,1692 1636,1676 1892,1676 1988,1580 v1(1988,1552)
IO-SWO: JX802.6 U801.39 | length 570.6
  Top w6: v1(2012,1628) 2014,1628 U801.39@2038,1653
  Bottom w6: 1560,1792 1872,1792 2012,1652 v1(2012,1628)
IO-USART1_RX: J801.P$3 JX801.2 U801.31 | length 2088.1
  Top w6: v1(1972,1482) U801.31@1997,1458
  Horizontal w6: v1(1460,1024) 1746,1024 v1(1752,1018) ; v1(1512,1528) 1584,1528 1608,1504 1950,1504 v1(1972,1482)
  Vertical w6: v1(1460,1024) 1460,1100 1448,1112 1448,1336 1512,1400 v1(1512,1528) 1512,1960 v1(1620,2068)
  Bottom w6: v1(1620,2068) 1628,2076 1716,2076 ; v1(1752,1018) 1758,1024 1776,1024 1800,1048
IO-USART1_TX: JX801.1 R101.P$2 U801.30 | length 1031.9
  Top w6: v1(1948,1480) 1948,1479 U801.30@1983,1444 ; v1(1948,1908) 1952,1912 R101.P$2@1952,1941
  Vertical w6: v1(1872,1096) 1876,1096 1916,1136 1916,1424 1900,1440 1900,1464 1916,1480 v1(1948,1480) v1(1948,1908)
  Bottom w6: v1(1872,1096) 1888,1096 1900,1084 1900,1048
IO-VDD_3V3: C802.P$1 C803.P$1 C804.P$1 C901.P$1 C903.P$1 C1003.P$1 C1004.P$1 D701.C J702.1 JX802.1 U801.9 U801.24 U801.36 U801.48 U902.2 U902.10 U902.19 U903.8 U1002.7 | length 879.8
  Top w10: v1(1444,1504) 1444,1505 U902.19@1444,1524 ; v2(1484,1148) 1497,1148 1509,1156 1518,1147 U903.8@1518,1107 ; v2(1544,1640) 1542,1643 1542,1681 1549,1688 1560,1688 ; C903.P$1@1564,1720 1564,1692 1560,1688 ; v2(1580,1500) 1580,1523 U902.2@1581,1524 ; U801.9@1704,1667 1683,1688 1560,1688 ; U801.24@1816,1375 1842,1375 v2(1848,1368) 1845,1365 C802.P$1@1845,1336 ; D701.C@1852,1864 1864,1864 v2(1880,1848) 1884,1845 1884,1816 1884,1807 U801.48@1913,1778 ; U801.36@2066,1528 2072,1534 v2(2072,1560) 2076,1557 C804.P$1@2104,1557
  Bottom w16: 1400,1692 1452,1692 v2(1480,1720) ; v2(1880,1848) 1879,1850 2037,1850
  other v1: 1436,1408 1456,1408
IO-VDD_5V5: C1001.P$1 C1005.P$1 D1001.3 J901.2 LED702.A LED703.A LED705.A U1002.1 U1002.4 | length 1256.7
  Top w10: v2(1560,1120) 1572,1120 C1005.P$1@1599,1147
  Top w12: v2(1476,1305) U1002.1@1499,1305 ; U1002.4@1558,1305 v2(1575,1288)
  Top w16: D1001.3@1424,1288 1460,1288 v2(1476,1305) ; v2(1575,1288) C1001.P$1@1599,1288
  Vertical w16: v2(1560,1120) 1560,1274 v2(1575,1288)
  Power w16: J901.2@1148,1045 1199,1096 1296,1096 1336,1136 1416,1136 1432,1120 v2(1560,1120)
  Bottom w10: 1328,1118 1347,1136 1412,1136 1431,1118 1488,1118 1558,1118 v2(1560,1120) 1563,1118 1648,1118 1647,1118
  Bottom w16: v2(1476,1305) 1513,1305 1516,1308 1555,1308 v2(1575,1288)
MAG_DRDY: U101.36 U504.9 X503.4 | length 1438.2
  Top w6: U101.36@2699,1534 2736,1497 v1(2736,1476) ; X503.4@3269,1048 3269,1169 v1(3288,1188) ; v1(3480,1188) 3484,1192 U504.9@3511,1192
  Horizontal w6: v1(2720,1164) 2860,1164 2936,1088 3244,1088 3268,1112 3268,1168 v1(3288,1188) v1(3480,1188)
  Vertical w6: v1(2720,1164) 2720,1460 v1(2736,1476)
MPU_DRDY: U101.62 U505.12 | length 1150.7
  Top w6: U101.62@2741,1993 2768,2020 v1(2828,2020) ; v1(3464,1640) 3484,1660 3484,1704 3491,1711 U505.12@3510,1711
  Horizontal w6: v1(2828,1788) 2840,1776 2840,1744 2880,1704 3392,1704 3456,1640 v1(3464,1640)
  Vertical w6: v1(2828,1788) 2828,1792 2832,1796 2832,2016 v1(2828,2020)
N$1: C103.P$2 U101.13 X101.1 | length 244.2
  Top w6: X101.1@2208,1394 2208,1424 2270,1486 ; U101.13@2282,1562 2256,1536 2256,1500 2270,1486 ; C103.P$2@2294,1462 2270,1486
N$2: C102.P$1 U101.12 X101.3 | length 273.7
  Top w6: X101.3@2099,1408 2100,1408 2160,1408 2230,1478 2230,1526 2230,1538 U101.12@2268,1576
N$3: R918.P$2 R922.P$1 | length 74.9
  Top w6: R922.P$1@1456,1776 1468,1776 R918.P$2@1512,1821
N$4: D1001.2 U1001.8 | length 402.3
  Top w10: D1001.2@1341,1251 1363,1251 v2(1376,1264) ; U1001.8@1566,1250 1607,1250 v1(1612,1244)
  Power w16: v2(1376,1264) 1388,1276 1484,1276 1516,1308 1556,1308 1564,1316 1584,1316 1612,1288 v1(1612,1244)
N$5: D201.C J201.1 L201.P$2 | length 167.8
  Top w10: v2(2340,2480) 2340,2417 D201.C@2341,2416
  Top w16: v2(2316,2480) v2(2340,2480) L201.P$2@2365,2480
  Bottom w16: v2(2316,2480) v2(2340,2480) 2340,2456 2345,2452
N$6: C509.P$1 U504.15 | length 79.3
  Top w6: C509.P$1@3535,1044 3556,1044 3564,1052 U504.15@3564,1099
N$7: LED704.C R711.P$2 | length 67
  Top w6: v1(1328,2572) 1349,2552 R711.P$2@1349,2548
  Bottom w6: 1328,2538 v1(1328,2572)
N$8: C613.P$1 U101.73 | length 56.7
  Top w6: U101.73@2588,2146 2617,2176 C613.P$1@2632,2176
N$9: LED705.C R712.P$2 | length 537.5
  Top w6: v1(1956,1260) R712.P$2@1956,1285
  Horizontal w6: v3(1648,1084) 1672,1060 1888,1060 1916,1088 1916,1236 1940,1260 v1(1956,1260)
  Bottom w6: 1648,1059 v3(1648,1084)
N$10: C510.P$1 U504.2 | length 72.9
  Top w6: U504.2@3618,1133 3669,1133 C510.P$1@3685,1148
N$11: C602.P$2 U603.6 | length 159.8
  Top w6: C602.P$2@3244,1440 3264,1440 3296,1472 3296,1532 3282,1547 U603.6@3268,1547
N$12: C611.P$1 U101.49 | length 169.6
  Top w6: U101.49@2880,1715 2856,1739 2856,1752 2888,1784 2947,1784 C611.P$1@2960,1771
N$13: R707.P$2 R735.P$1 | length 41
  Top w6: R735.P$1@1628,2548 R707.P$2@1669,2548
N$14: J203.4 R215.P$2 | length 1156.3
  Top w6: v1(2100,2004) 2116,1988 R215.P$2@2125,1988
  Horizontal w6: v1(2052,1444) 2272,1444 2392,1324 v1(2392,1308)
  Vertical w6: v1(2052,1444) 2052,1500 2092,1540 2092,1772 2044,1820 2044,1948 v1(2100,2004)
  Bottom w6: 2341,1248 2372,1248 2392,1268 v1(2392,1308)
N$15: R803.P$1 U801.12 | length 570.1
  Top w6: U801.12@1663,1625 1679,1608 1848,1608 v1(1888,1648) ; R803.P$1@1908,1941 1908,1916 v1(1924,1900)
  Vertical w6: v1(1888,1648) 1932,1692 1932,1892 v1(1924,1900)
N$16: R804.P$1 U801.13 | length 663.1
  Top w6: U801.13@1663,1528 1672,1538 1672,1560 1696,1584 1888,1584 v1(1968,1664) ; v1(1996,1908) R804.P$1@1996,1941
  Vertical w6: v1(1968,1664) 1996,1692 v1(1996,1908)
N$17: C510.P$2 U504.3 | length 124.2
  Top w6: U504.3@3618,1152 3644,1152 3664,1172 3700,1172 C510.P$2@3724,1148
N$18: C806.P$2 U801.6 X801.1 | length 139.2
  Top w6: X801.1@1642,1794 1651,1794 1698,1746 1708,1746 U801.6@1746,1709
N$19: J203.5 R216.P$2 | length 1517.7
  Top w6: R216.P$2@2947.99,1920 2948,1936 v1(2956,1944)
  Horizontal w6: v1(2408,2008) 2464,2008 2492,1980 2576,1980 2584,1972 2632,1972 2652,1992 2904,1992 v1(2956,1944)
  Vertical w6: v1(2392,1180) 2416,1204 2416,2000 v1(2408,2008)
  Bottom w6: 2341,1199 2374,1199 v1(2392,1180)
N$20: R1001.P$2 U1001.7 | length 36.8
  Top w6: U1001.7@1566,1230 1583,1230 R1001.P$2@1597,1216
N$21: D602.C R608.P$2 | length 64.7
  Top w10: D602.C@1859,2268 1889,2239 R608.P$2@1889,2216
N$22: C805.P$1 U801.5 X801.3 | length 223.8
  Top w6: X801.3@1655,1903 1655,1846 1727,1775 1727,1756 U801.5@1760,1723
N$23: R101.P$1 U101.69 | length 892.4
  Top w6: R101.P$1@1952,1980 v1(1952,2004) ; v1(2584,2084) 2604,2064 2617,2064 U101.69@2644,2091
  Bottom w6: v1(1952,2004) 2012,2064 2272,2064 2416,2208 2468,2208 2476,2200 2504,2200 2584,2120 v1(2584,2084)
N$24: R705.P$2 R706.P$1 U702.2 | length 303.1
  Top w6: R705.P$2@1349,2168 1349,2192 ; R706.P$1@1349,2216 1349,2192 ; v1(1408,2192) 1349,2192 ; v1(1512,2088) 1556,2088 U702.2@1559,2092
  Horizontal w6: v1(1408,2192) v1(1512,2088)
N$25: R702.P$1 R703.P$2 U702.8 | length 144.4
  Top w6: R703.P$2@1349,2024 1349,2033 1388,2072 1395,2066 U702.8@1466,2066
N$26: LED701.C R735.P$2 | length 126.8
  Top w6: v1(1568,2572) 1589,2552 R735.P$2@1589,2548
  Bottom w6: 1488,2538 1523,2572 v1(1568,2572)
N$27: C703.P$1 J701.1 R703.P$1 U702.1 | length 993
  Top w6: v1(1368,2000) 1388,2000 ; C703.P$1@1388,1976 1388,2000 ; U702.1@1559,2066 1554,2066 1536,2048 1412,2048 1388,2024 1388,2000
  Bottom w6: v1(1368,2000) 1368,1992 1304,1928 1304,1692 1336,1660 1578,1660 1597,1641 1685,1641
N$28: R701.P$1 U702.7 | length 89.3
  Top w6: R701.P$1@1388,2120 1417,2092 U702.7@1466,2092
N$29: LED702.C R708.P$2 | length 576.2
  Top w6: R708.P$2@1812,1045 1825,1032 1844,1032 v1(1848,1028)
  Horizontal w6: v1(1424,1044) 1468,1044 1476,1036 1840,1036 v1(1848,1028)
  Bottom w6: 1328,1059 1410,1059 v1(1424,1044)
N$30: C505.P$1 U502.14 | length 58
  Top w6: U502.14@3358,1289 C505.P$1@3416,1289
N$31: J901.10 R914.P$2 | length 161.8
  Top w16: J901.10@1248,1345 1248,1364 1304,1420 1304,1448 1320,1464 R914.P$2@1333,1464
N$32: L701.P$2 U702.5 | length 151.6
  Top w6: U702.5@1466,2143 1466,2250 1482,2266 L701.P$2@1503.99,2266
N$33: J401.2 R404.P$2 | length 495
  Top w6: R404.P$2@2812,1080 v1(2888,1080)
  Bottom w6: v1(2888,1080) 3028,1080 3197,1249 3237,1249
N$34: R616.P$1 U602.7 | length 48.6
  Top w6: R616.P$1@3380,2028 3382,2031 U602.7@3427,2031
N$35: C504.P$1 U501.14 | length 59.4
  Top w6: U501.14@3627,1492 3680,1492 C504.P$1@3685,1496
N$36: C704.P$1 R705.P$1 U702.6 | length 175.8
  Top w6: C704.P$1@1436,2197 1436,2172 1432,2168 1388,2168 1388,2165 1432,2120 1463,2120 U702.6@1466,2117
N$37: J401.3 R405.P$2 | length 492.9
  Top w6: R405.P$2@2812,1036 2880,1036 v1(2904,1060)
  Bottom w6: v1(2904,1060) 3028,1060 3168,1200 3237,1200
N$38: D902.C R901.P$2 R910.P$1 U903.3 | length 648.3
  Top w6: R910.P$1@1372,1204 v1(1392,1204) D902.C@1413,1204 ; U903.3@1379,1056 1404,1056 1416,1068 v1(1432,1068) ; v1(1636,1316) 1644,1324 R901.P$2@1644,1337
  Horizontal w6: v1(1392,1204) 1492,1204 1512,1180 1604,1180 1632,1208 1632,1312 v1(1636,1316)
  Vertical w6: v1(1392,1204) 1420,1176 1420,1080 v1(1432,1068)
N$39: R709.P$2 R736.P$1 | length 304.1
  Top w6: R736.P$1@1708,1084 v1(1708,1120) ; v1(1884,1136) 1884,1145 R709.P$2@1912,1173
  Horizontal w6: v1(1708,1120) 1708,1108 1732,1084 1832,1084 v1(1884,1136)
N$40: LED703.C R736.P$2 | length 246
  Top w6: v3(1624,1084) 1664,1045 R736.P$2@1708,1045
  Bottom w6: 1488,1059 1490,1060 1600,1060 v3(1624,1084)
N$41: D402.C J403.1 L402.P$2 | length 171
  Top w16: D402.C@3104,2416 v1(3104,2432) L402.P$2@3104,2449
  Bottom w16: v1(3104,2432) 3184,2432 3196,2444 3237,2444
N$42: D401.C J401.1 J402.1 L401.P$2 | length 498.6
  Top w10: L401.P$2@3415.99,1136 3461,1136 D401.C@3468,1128
  Top w16: L401.P$2@3415.99,1136 v2(3416,1256)
  Bottom w10: 3540,1256 3541,1258
  Bottom w16: 3237,1298 3375,1298 v2(3416,1256) 3540,1256
N$43: R905.P$1 U902.20 | length 178.5
  Top w6: R905.P$1@1372,1416 1396,1416 1404,1424 1404,1464 1424,1484 1476,1484 1483,1491 U902.20@1483,1504
N$44: R914.P$1 U902.18 | length 126.2
  Top w6: R914.P$1@1372,1464 1416,1509 1416,1544 1442,1544 U902.18@1444,1543
N$45: R906.P$1 U902.17 | length 111.9
  Top w6: R906.P$1@1372,1512 1384,1512 1400,1528 1400,1560 1403,1563 U902.17@1444,1563
N$46: D1001.1 F1001.2 | length 785
  Top w24: v2(1340,1300) 1341,1324 D1001.1@1341,1326 ; v2(1480,1948) F1001.2@1480,1999.99 F1001.2@1481,2000
  Power w24: v2(1340,1300) 1340,1696 1480,1836 v2(1480,1948)
N$47: C1108.P$1 R1105.P$2 R1106.P$1 U1101.P$1 | length 203.4
  Top w6: R1105.P$2@3212,2428 3252,2428 3296,2428 3297,2428 3340,2428 3362,2407 U1101.P$1@3362,2362
N$48: D404.C J405.1 L403.P$2 | length 204.5
  Top w10: D404.C@2456,1324 2461,1320 L403.P$2@2503.99,1320
  Top w16: L403.P$2@2503.99,1320 v2(2536,1320)
  Bottom w10: 2639,1292 2645,1298
  Bottom w16: v2(2536,1320) 2559,1298 2564,1292 2639,1292
N$49: R915.P$1 U902.16 | length 81.8
  Top w6: R915.P$1@1372,1560 1394,1583 U902.16@1444,1583
N$50: C512.P$1 U505.10 | length 54.1
  Top w6: C512.P$1@3456,1750 3461,1751 U505.10@3510,1751
N$51: C515.P$1 U505.20 | length 61.6
  Top w8: U505.20@3667,1731 3716,1731 C515.P$1@3728,1735
N$52: 
N$53: R907.P$1 U902.15 | length 74.5
  Top w6: R907.P$1@1372,1608 1378,1602 U902.15@1444,1602
N$54: R1106.P$2 R1107.P$1 U1101.P$2 | length 235.6
  Top w6: R1107.P$1@3212,2384 3248,2384 3252,2389 3252,2404 3256,2408 3336,2408 3344,2400 3344,2380 3336,2372 3336,2352 3347,2342 U1101.P$2@3362,2342
N$55: C1109.P$1 R1109.P$2 R1110.P$1 U1101.P$3 | length 154.5
  Top w6: R1109.P$2@3212,2328 3252,2328 3296,2328 3309,2328 3316,2320 3360,2320 U1101.P$3@3362,2322
N$56: R1110.P$2 R1111.P$1 U1101.P$4 | length 170.9
  Top w6: R1111.P$1@3212,2284 3248,2284 3252,2289 3252,2304 3256,2308 3320,2308 3326,2303 U1101.P$4@3362,2303
N$57: J702.2 R710.P$1 | length 716.2
  Top w6: v1(1884,1280) 1885,1280 R710.P$1@1912,1253
  Bottom w6: v1(1884,1280) 1884,1340 2048,1504 2048,1576 2060,1588 2060,1636 1976,1720 1976,1780 1996,1800 2037,1800
N$58: R916.P$1 U902.14 | length 85.8
  Top w6: R916.P$1@1372,1656 1407,1622 U902.14@1444,1622
N$59: R908.P$1 U902.13 | length 109.1
  Top w6: R908.P$1@1372,1704 1400,1676 1400,1656 1415,1642 U902.13@1444,1642
N$60: R917.P$1 U902.12 | length 128.1
  Top w6: R917.P$1@1372,1752 1384,1752 1444,1693 U902.12@1444,1661
N$61: R902.P$1 U901.20 | length 137.1
  Top w6: R902.P$1@1388,2264 1416,2292 1476,2292 1499,2315 U901.20@1499,2320
N$62: R911.P$1 U901.18 | length 91.5
  Top w6: R911.P$1@1388,2312 1435,2359 U901.18@1460,2359
N$63: R903.P$1 U901.17 | length 79.9
  Top w6: R903.P$1@1388,2360 1407,2379 U901.17@1460,2379
N$64: R912.P$1 U901.16 | length 75.5
  Top w6: R912.P$1@1388,2408 1398,2399 U901.16@1460,2399
N$65: R904.P$1 U901.15 | length 87.7
  Top w6: R904.P$1@1388,2456 1426,2418 U901.15@1460,2418
N$66: R913.P$1 U901.14 | length 110.8
  Top w6: R913.P$1@1388,2504 1416,2476 1416,2456 1435,2438 U901.14@1460,2438
N$67: R1113.P$2 R1114.P$1 U1101.P$6 | length 208.5
  Top w6: R1114.P$1@3212,2184 R1113.P$2@3252,2184 3252,2185 3252,2200 3256,2204 3316,2204 3336,2224 3336,2252 3347,2263 U1101.P$6@3362,2263
N$68: J901.34 R911.P$2 | length 208.8
  Top w6: R911.P$2@1349,2309 R911.P$2@1349,2312
  Top w12: J901.34@1248,2156 1300,2208 1300,2260 R911.P$2@1349,2309
  Top w16: J901.34@1248,2145 J901.34@1248,2156
N$69: C1110.P$1 R1112.P$2 R1113.P$1 U1101.P$5 | length 199.5
  Top w6: R1112.P$2@3212,2228 3248,2228 3252,2224 3296,2224 3297,2224 3316,2224 3324,2232 3324,2272 3335,2283 U1101.P$5@3362,2283
N$70: R201.P$1 U201.20 | length 40.6
  Top w6: R201.P$1@2008,2216 2024,2216 2027,2214 U201.20@2048,2214
N$71: J901.13 R906.P$2 | length 112.8
  Top w16: J901.13@1248,1445 1315,1512 R906.P$2@1333,1512